# Altium PCB CVC_power.PcbDoc
Units mm, origin at the board's own origin, x right, y up, seen from the top; angles counter-clockwise.
Board outline 55 x 90 mm, 4 copper layers (Top Layer, Internal Plane 1, Internal Plane 2, Bottom Layer); 13 components, 11 nets, 46 pads, 2 vias.
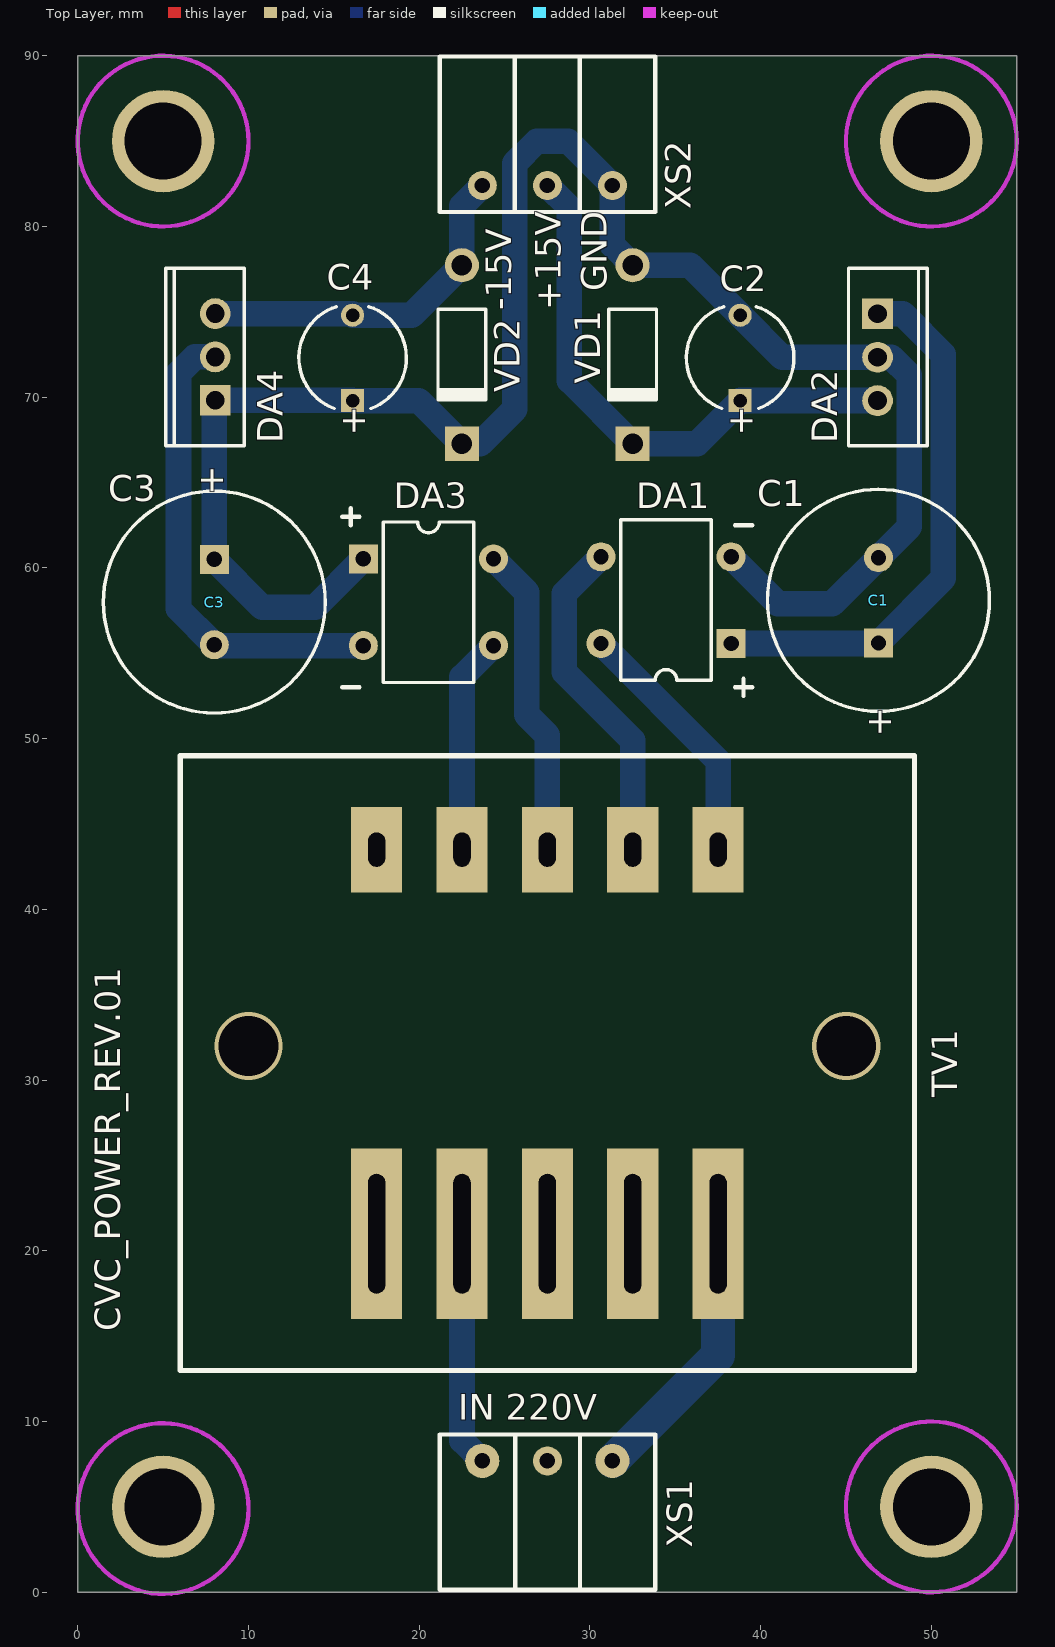
[diagram p0: Top Layer view]
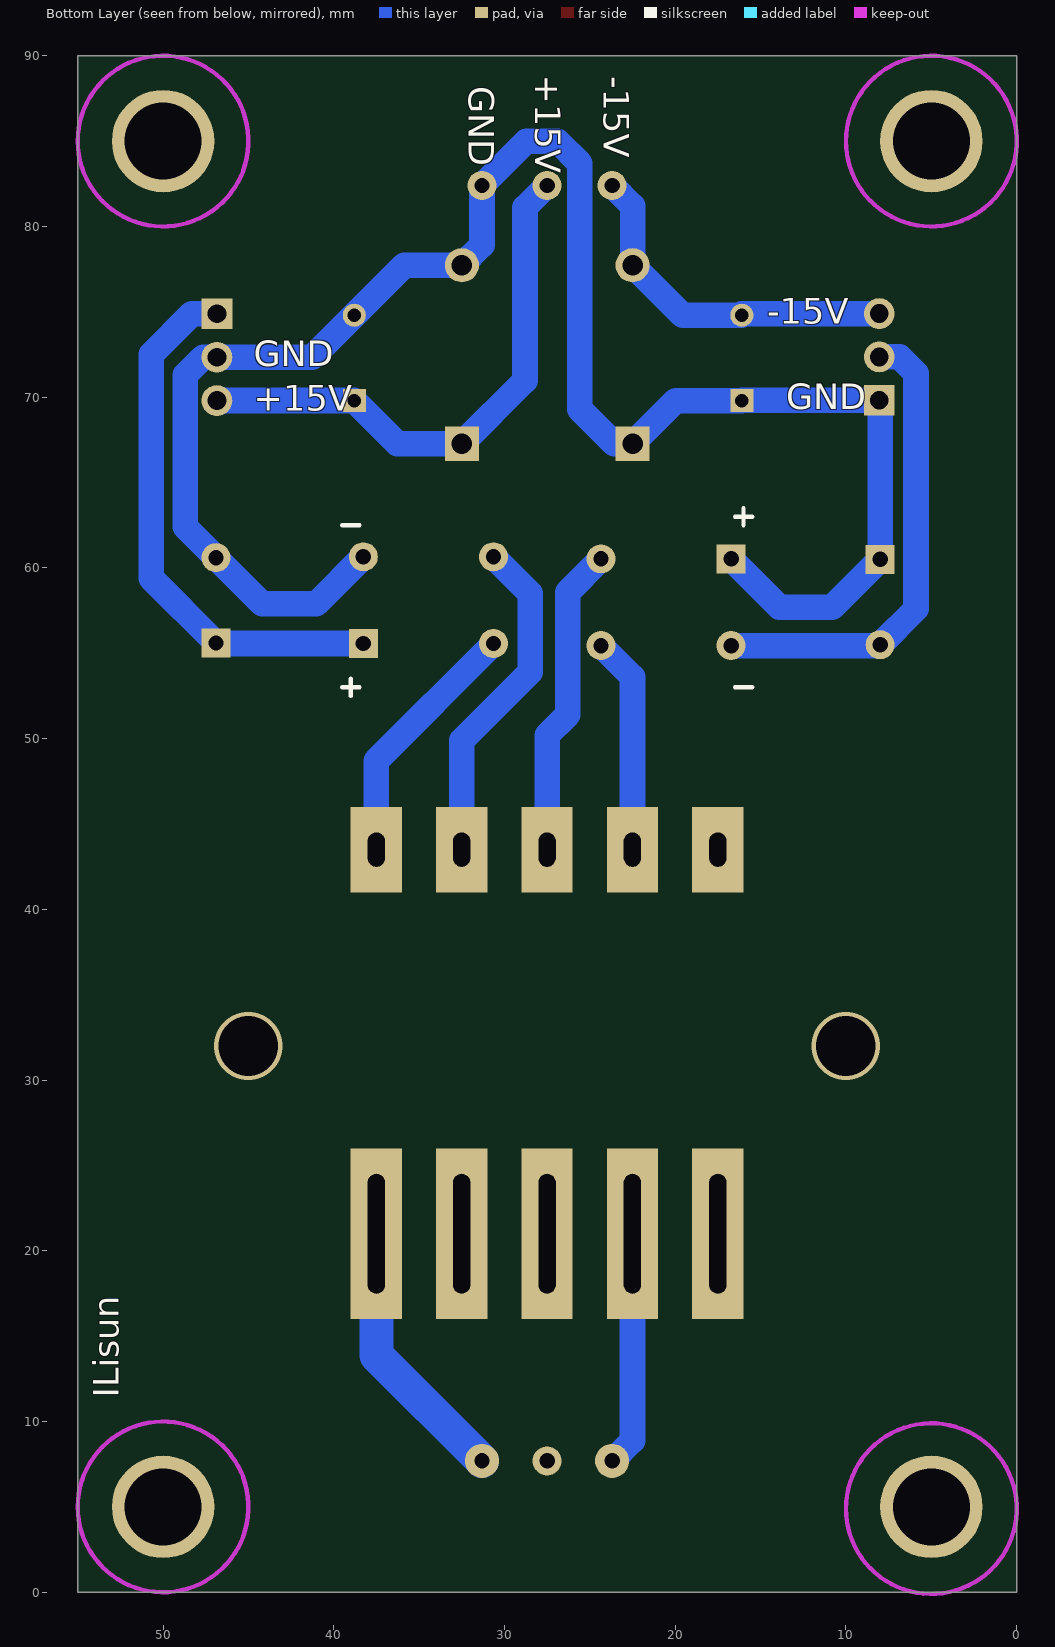
[diagram p1: Bottom Layer view, seen from below]
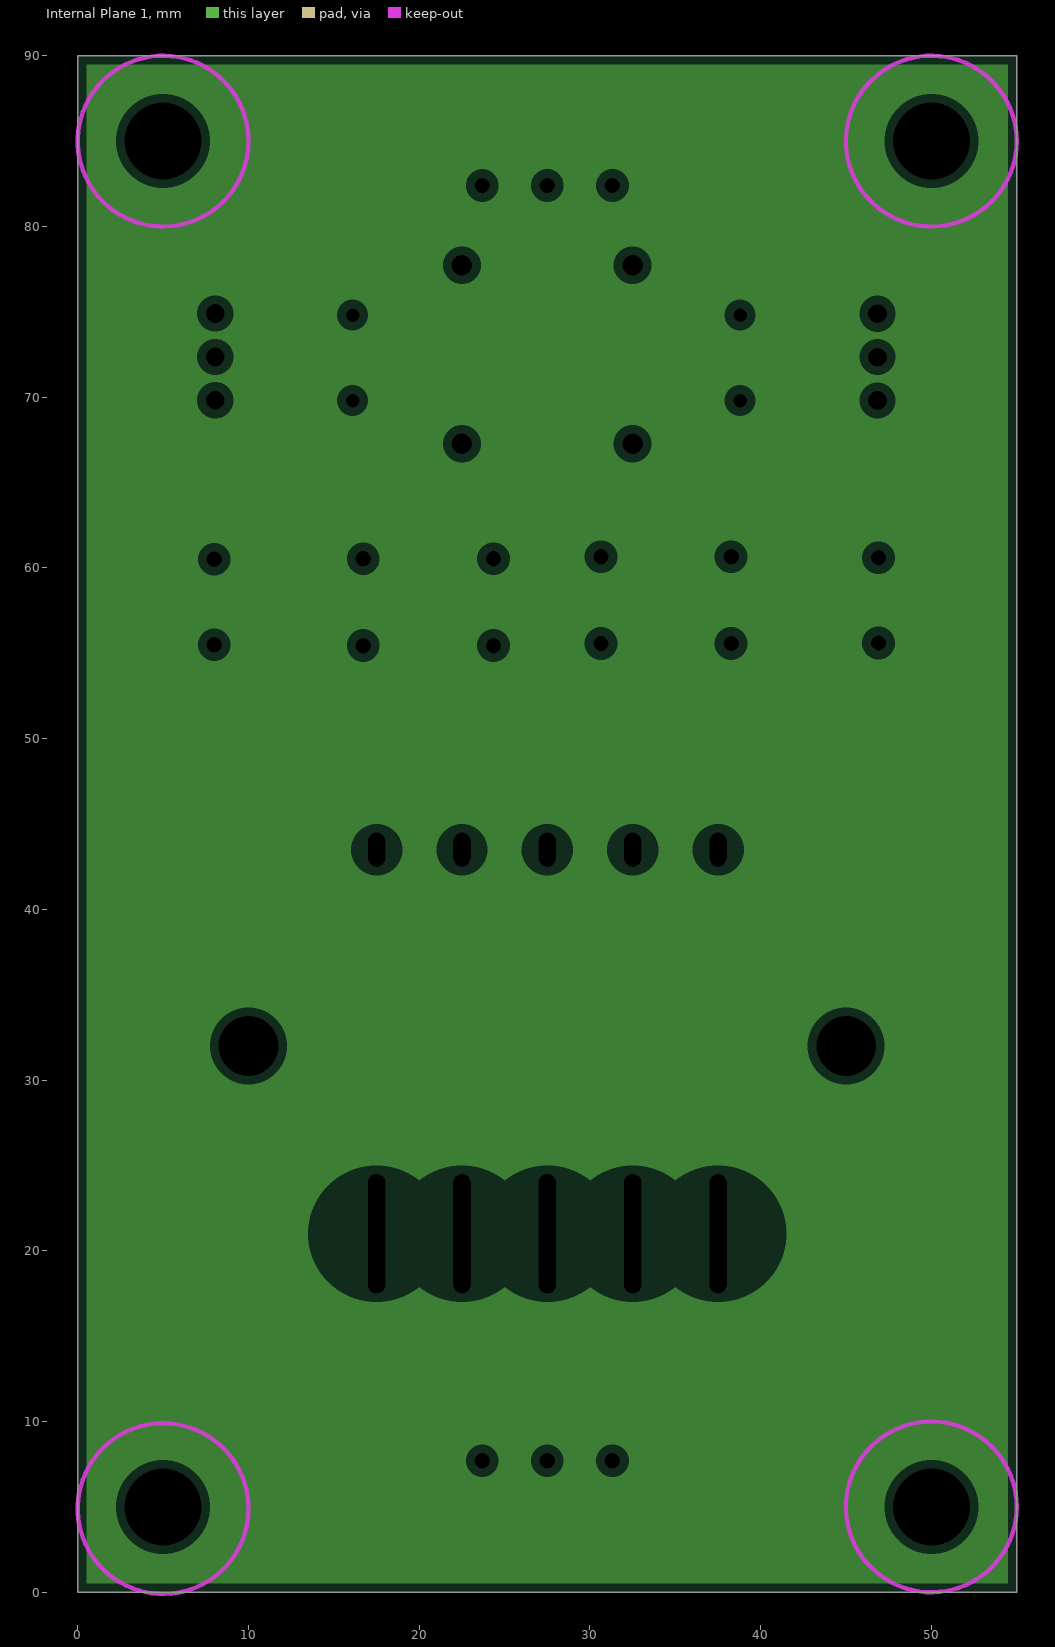
[diagram p2: Internal Plane 1, clearances drawn from the general rule]
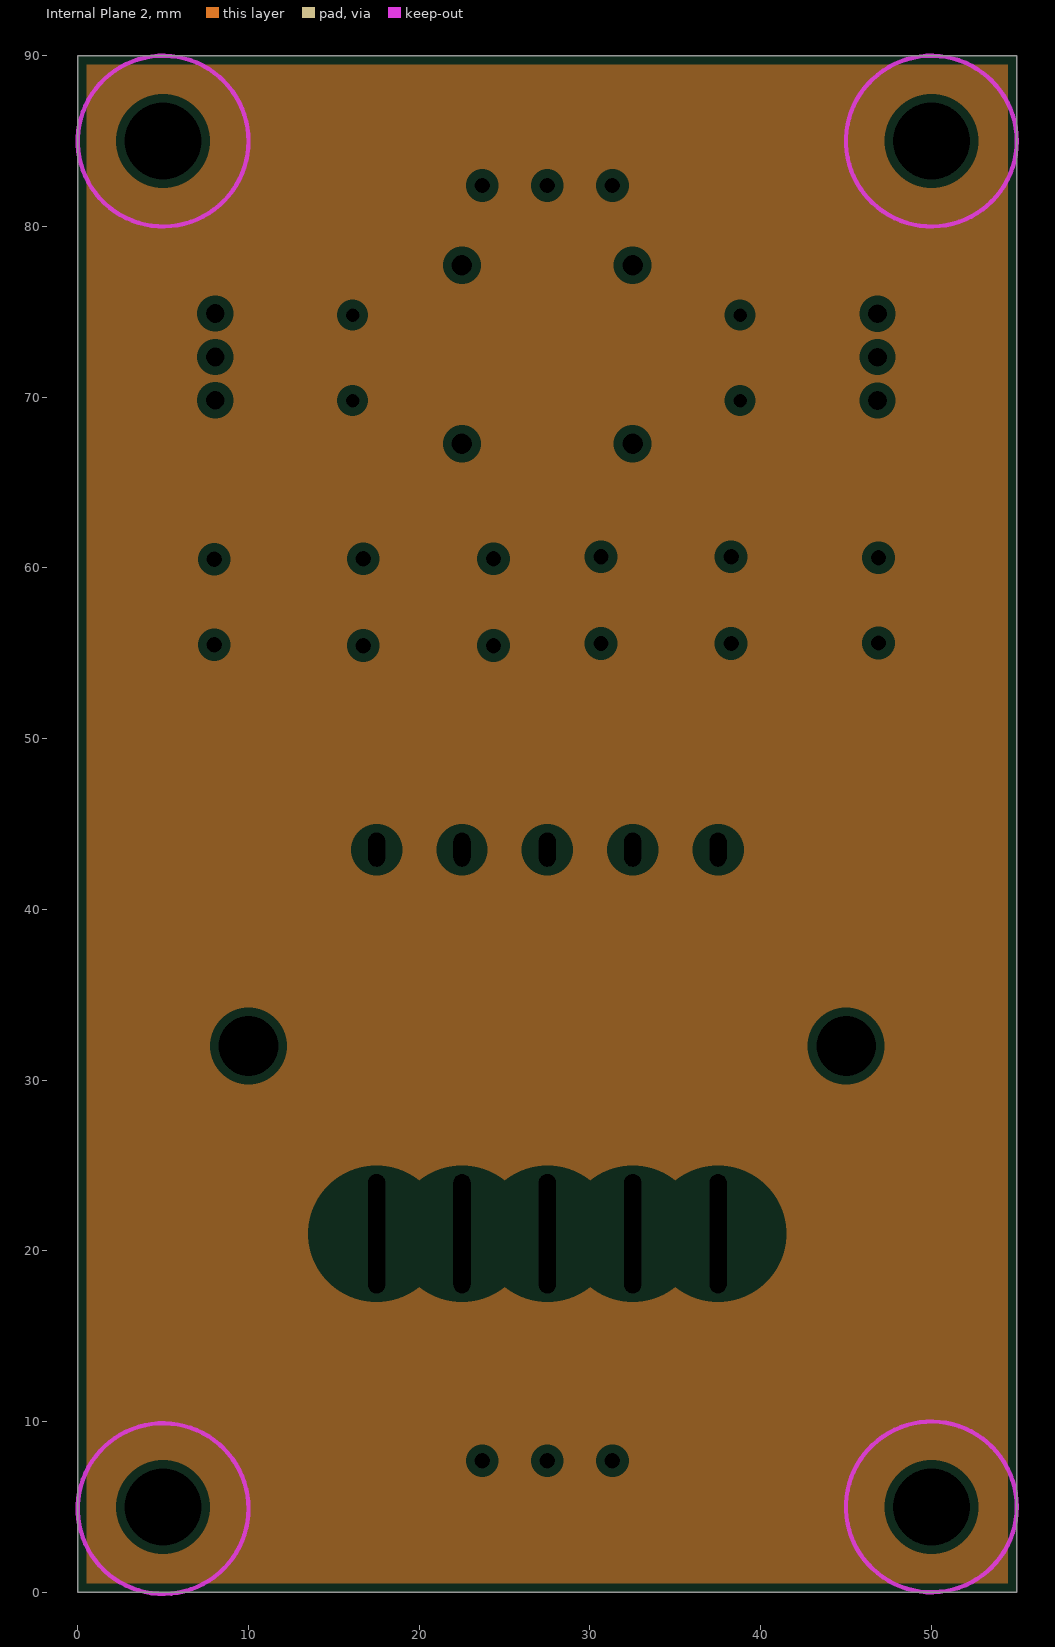
[diagram p3: Internal Plane 2, clearances drawn from the general rule]

## Layer stack, top to bottom
Top Layer: signal copper 0.0356
Dielectric: dielectric 0.32, FR-4, Dk 4.8
Internal Plane 1: plane copper 0.0356
Dielectric: dielectric 0.32, FR-4, Dk 4.8
Internal Plane 2: plane copper 0.0356
Dielectric: dielectric 0.32, FR-4, Dk 4.8
Bottom Layer: signal copper 0.0356

## Board outline
0,0 0,90 55,90 55,0

## Design rules (kind name [scope] priority, off if disabled: settings)
Clearance [All] p1: gap=0.2
ComponentClearance [All] p1: gap=0.1 collisioncheckmode=3 verticalgap=0.1 showdistances=FALSE
Height [All] p1: minheight=0 maxheight=40 prefheight=12.7
PlaneClearance [All] p1: clearance=0.508
PlaneConnect [All] p1: planeconnectstyle=Relief reliefexpansion=0.508 reliefentries=4 reliefconductorwidth=0.254 reliefairgap=0.254
PolygonConnect [All] p1: connectstyle=Relief reliefconductorwidth=0.254 reliefentries=4 polygonreliefangle="90 Angle"
RoutingVias [All] p1: holewidth=0.7 width=1.3 viastyle="Through Hole" minholewidth=0.6 minwidth=1 maxholewidth=2 maxwidth=2
SilkToSilkClearance [All] p1: silktosilkclearance=0.1
SilkscreenOverComponentPads [All] p1: minsilkscreentomaskgap=0.1
SolderMaskExpansion [All] p1: expansion=0.102
Width [All] p1: maxlimit=3 minlimit=0.2 preferedwidth=1.5
22 further rules are at their usual default settings.

## Components (designator, comment, footprint, x,y, rotation, side; value= is the part's Value field where it differs from the comment)
C1 "Конденсатор К50-68" CAPPR5-13x20 46.9,58.1 r90 top
C2 "Конденсатор К50-68" CAPPR5-6.3X11.5 38.8,72.3 r90 top
C3 "Конденсатор К50-68" CAPPR5-13x20 8,58 r270 top
C4 "Конденсатор К50-68" CAPPR5-6.3X11.5 16.1,72.3 r90 top
DA1 "диодный мост" DF08M 31.8,53.4 r90 top
DA2 "L7815ACV" TO220 46.8,74.9 r270 top
DA3 "диодный мост" DF08M 23.2,62.7 r270 top
DA4 "L7915ACV" TO220 8.1,69.8 r90 top
TV1 "Трансформатор ТП 112/ТПК-2" "Transformer TP 112/TPK - 2" 49.008,13 r180 top
VD1 "1N4001" DO-41 32.5,72.5 r270 top
VD2 "1N4001" DO-41 22.5,72.5 r270 top
XS1 "Клемма 15EDGRC-3.81-03P (XY2500R)" 15EDGRC-3.81-03P#1 31.318,7.696 r180 top
XS2 "Клемма 15EDGRC-3.81-03P (XY2500R)" 15EDGRC-3.81-03P#2 23.698,82.4 r0 top

## Footprints (in the part's own frame and the unit in brackets; to place one, negate y for a bottom-side part, rotate by r counter-clockwise, add the part's x,y. Pads: shape width x height; smd on the part's side, far side on the other; paste and mask are expansions set on the pad)
15EDGRC-3.81-03P#1 [mm] "XY2500R - клемма контакная угловая"
  round 2 hole 0.9: 1(0,0) 3(7.62,0)
  round 1.7 hole 0.9: 2(3.81,0)
  silkscreen extent -2.5,-1.55 10.12,7.55
15EDGRC-3.81-03P#2 [mm] "XY2500R - клемма контакная угловая"
  round 1.7 hole 0.9: 1(0,0) 2(3.81,0) 3(7.62,0)
  silkscreen extent -2.5,-1.55 10.12,7.55
CAPPR5-6.3X11.5 [mm]
  rect 1.35x1.35 hole 0.8: 1(-2.5,0)
  round 1.35 hole 0.8: 2(2.5,0)
  silkscreen extent -2.96,-3.15 3,3.15
CAPPR5-13x20 [mm]
  rect 1.7x1.7 hole 0.9: 1(-2.5,0)
  round 1.7 hole 0.9: 2(2.5,0)
  silkscreen extent -6.5,-6.5 6.5,6.5
DF08M [mm] "Диодный мост"
  rect 1.7x1.7 hole 0.9: 1(2.17,-6.47)
  round 1.7 hole 0.9: 2(7.25,-6.47) 3(7.25,1.15) 4(2.17,1.15)
  silkscreen extent 0.01,-5.31 9.41,-0.01
DO-41 [mm]
  round 2 hole 1.2: 1(-5.23,0)
  rect 2x2 hole 1.2: 2(5.23,0)
  silkscreen extent -2.65,-1.4 2.75,1.4
TO220 [mm]
  rect 1.8x1.8 hole 1.1: 1(0.017,0.047)
  round 1.8 hole 1.1: 2(5.097,0.047) 3(2.557,0.047)
  silkscreen extent -2.64,-1.65 7.76,2.95
"Transformer TP 112/TPK - 2" [mm]
  rect 3x10 hole 1 slot 7 at 90 deg: 1(11.5,-8) 2(16.5,-8) 3(21.5,-8) 4(26.5,-8) 5(31.5,-8)
  rect 3x5 hole 1 slot 2 at 90 deg: 6(31.5,-30.5) 7(26.5,-30.5) 8(21.5,-30.5) 9(16.5,-30.5) 10(11.5,-30.5)
  silkscreen extent 0,-36 43,0

## Part data
C1 C2 C3 C4: "Электролитический конденсатор"
DA1 DA3: library part "Мост DB08M"

## Free pads (board coordinates)
  round 6 hole 4.5: 1(5,5) 1(5,85) 1(50,85) 1(50,5)

## Via types
v1: diameter 4, hole 3.5, Top Layer to Bottom Layer, 2 vias

## Nets (pads, with @x,y where several pads share a name; then routed paths per layer and width w, separated by ;. In a path a pad name is that pad's centre, name@x,y a point inside that pad or via, vN(x,y) a via of type N, cw(c..) or ccw(c..) an arc to the next point about the centre after c; other vN are vias at no path point)
+15V: C2.1 DA2.2 VD1.2 XS2.2 | length 32.6
  Bottom Layer w1.5: XS2.2 28.8,81.108 28.8,70.97 VD1.2 36.27,67.27 C2.1 38.803,69.803 DA2.2
-15V: C4.2 DA4.2 VD2.1 XS2.1 | length 20.8
  Bottom Layer w1.5: DA4.2 C4.2@16.097,74.897 ; C4.2 19.57,74.8 VD2.1 22.5,81.202 XS2.1
GND: C1.2 C2.2 C3.1 C4.1 DA1.2 DA2.3 DA3.1 DA4.1 VD1.1 VD2.2 XS2.3 | length 107.9
  Bottom Layer w1.5: C4.1 19.97,69.8 VD2.2 23.57,67.27 25.6,69.3 25.6,83.7 26.9,85 28.718,85 XS2.3 31.318,78.912 VD1.1 35.87,77.73 C2.2 41.257,72.343 DA2.3 47.657,72.343 48.7,71.3 48.7,62.4 C1.2 44.2,57.9 41.02,57.9 DA1.2 ; C4.1@16.1,69.817 DA4.1 8,69.764 C3.1 10.8,57.7 13.9,57.7 DA3.1
NetC1_1: C1.1 DA1.1 DA2.1 | length 32
  Bottom Layer w1.5: DA1.1 46.87,55.57 C1.1 50.7,59.4 50.7,72.5 48.317,74.883 DA2.1
NetC3_2: C3.2 DA3.2 DA4.3 | length 28.1
  Bottom Layer w1.5: DA4.3 6.857,72.357 5.9,71.4 5.9,57.6 C3.2 8.05,55.45 DA3.2
NetDA1_3: DA1.3 TV1.9 | length 19.7
  Bottom Layer w1.5: DA1.3 28.5,58.5 28.5,53.9 32.508,49.892 TV1.9
NetDA1_4: DA1.4 TV1.10 | length 14.9
  Bottom Layer w1.5: DA1.4 37.508,48.712 TV1.10
NetDA3_3: DA3.3 TV1.7 | length 12.7
  Bottom Layer w1.5: TV1.7 22.508,53.608 DA3.3
NetDA3_4: DA3.4 TV1.8 | length 18.3
  Bottom Layer w1.5: DA3.4 26.3,58.58 26.3,51.4 27.508,50.192 TV1.8
NetTV1_1: TV1.1 XS1.1 | length 15.9
  Bottom Layer w2: XS1.1 37.508,13.886 TV1.1
NetTV1_4: TV1.4 XS1.3 | length 13.8
  Bottom Layer w1.5: TV1.4 22.508,8.886 XS1.3
pads on no net: TV1.2 TV1.3 TV1.5 TV1.6 XS1.2
copper on no net:
  other v1: 10.008,32 45.008,32

## Polygon pours and split planes (outlines as drawn)
no net on Internal Plane 1 (split plane): 54.49,0.51 0.51,0.51 0.51,89.49 54.49,89.49
no net on Internal Plane 2 (split plane): 54.49,0.51 0.51,0.51 0.51,89.49 54.49,89.49

## Keep-outs
Keep-Out Layer:
  circle w0.254: c50,5 r5
  circle w0.254: c5,4.9 r5
  circle w0.254: c5,85 r5
  circle w0.254: c50,85 r5

## Silkscreen, mask and mechanical layers (free items; w line width, h text height)
Top Overlay:
  lines w0.254: 15.5,53 16.5,53 ; 15.5,63 16.5,63 ; 16,62.5 16,63.5 ; 38.5,53 39.5,53 ; 38.5,62.5 39.5,62.5 ; 39,52.5 39,53.5
  text "GND" at 31,76.2 h1.5 r90
  text "-15V" at 25.4,75.1 h1.5 r90
  text "+15V" at 28.3,75.1 h1.5 r90
  text "C3" at 1.8,63.9 h1.52
  text "C1" at 39.8,63.6 h1.52
  text "CVC_POWER_REV.01" at 2.5,15.3 h1.5 r90
  text "IN 220V" at 22.3,10.1 h1.5
Bottom Overlay:
  lines w0.254: 15.5,53 16.5,53 ; 15.5,63 16.5,63 ; 16,62.5 16,63.5 ; 38.5,53 39.5,53 ; 38.5,62.5 39.5,62.5 ; 39,52.5 39,53.5
  text "+15V" at 28.2,88.9 h1.5 r90
  text "-15V" at 24.2,88.8 h1.5 r90
  text "GND" at 32.1,88.2 h1.5 r90
  text "-15V" at 14.6,74.3 h1.5
  text "GND" at 44.7,71.8 h1.5
  text "GND" at 13.5,69.3 h1.5
  text "+15V" at 44.7,69.2 h1.5
  text "ILisun" at 52.6,11.4 h1.5 r270
Mechanical 1:
  the board outline again, w0.5
Mechanical 15:
  lines w0.254: 50.5,64.9 50.6,65

## Dimensions
5,5 to 50,5 on Mechanical 15
50,5 to 50,85 on Mechanical 15
5,85 to 5,5 on Mechanical 15
0,90 to 0,0 on Mechanical 15
5,85 to 50,85 on Mechanical 15
0,0 to 55,0 on Mechanical 15

## Text inside footprints (layer, text, board x,y; h text height)
C1: Top Overlay "+" at 47.65,50.125 h1.5 r90
C2: Top Overlay "+" at 39.55,67.75 h1.5 r90
C3: Top Overlay "+" at 7.25,65.975 h1.5 r270
C4: Top Overlay "+" at 16.85,67.75 h1.5 r90